# EAGLE board knxhome-lqfp48 (EAGLE 9.3.1)
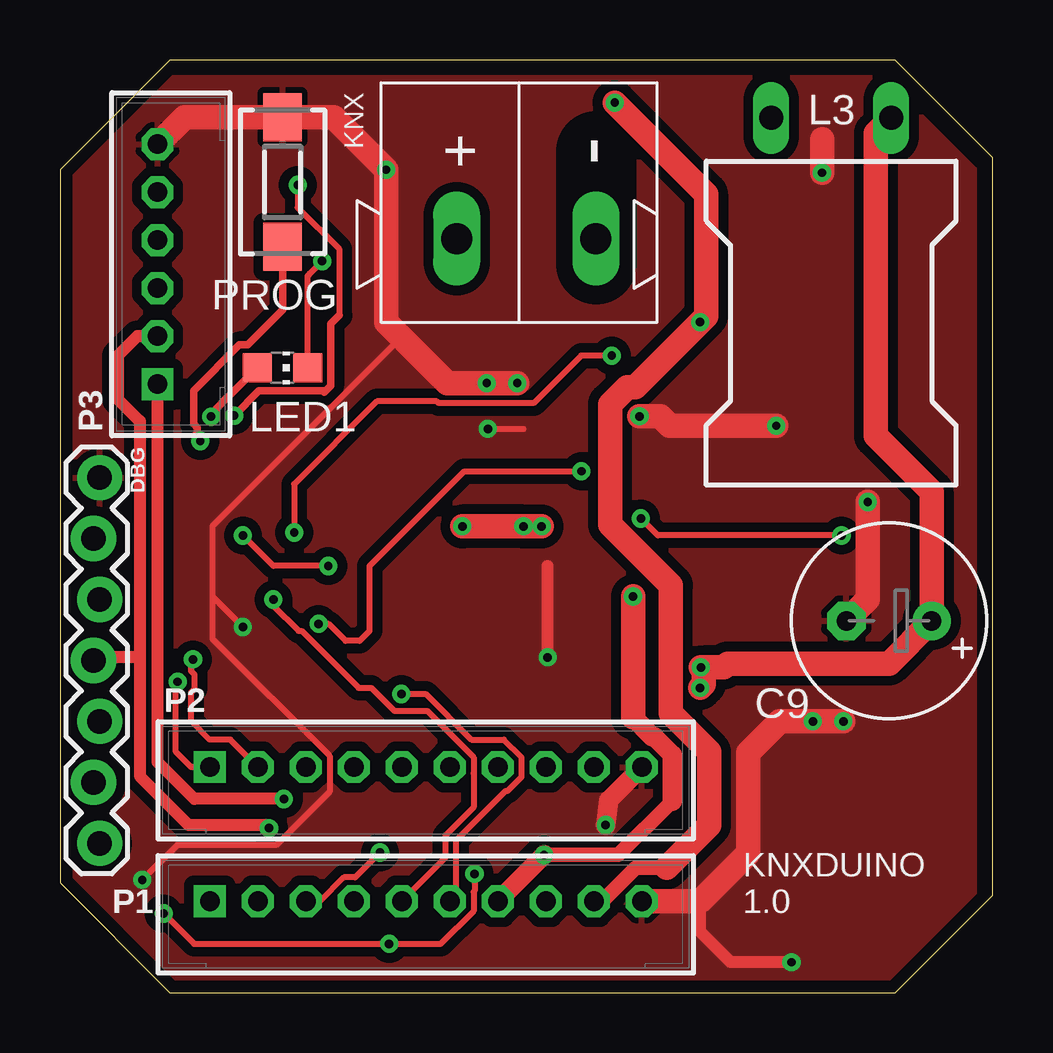
[diagram p0: board, top side]
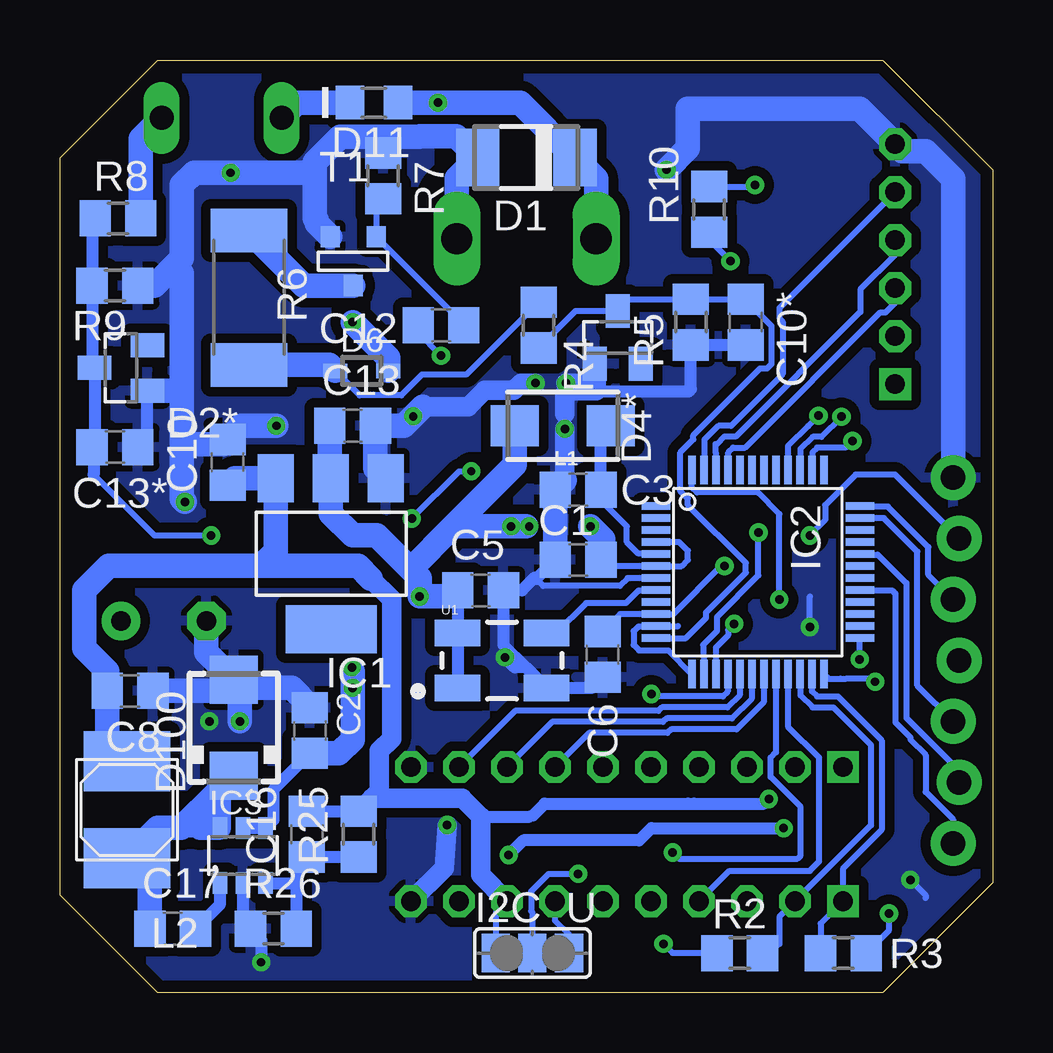
[diagram p1: board, bottom side, seen from below]

Size 38.86 x 38.86 mm. Coordinates in mm from the lower left corner, seen from the top.
Outline: 38.86,4.06 38.86,34.8 34.8,38.86 4.57,38.86 0,34.29 0,4.57 4.57,0 34.8,0 38.86,4.06
Copper layers (1*16): Top 0.035mm / dielectric 1.5mm / Bottom 0.035mm
Design rules "default *": minimum track width 8mil, minimum drill 0.35mm, track to track 8mil, track to pad 8mil, pad to pad 6mil, via to via 8mil, smd to smd 6mil, copper to edge 20mil, drill to drill 6mil, minimum pad ring 10mil, minimum via ring 8mil, stop-mask expansion 4mil, vias tented up to drill 40mil, thermal gap 10mil
Net classes: 1 power: width 0.305 mm
tRestrict: 1 lines
bRestrict: 3 lines

## Footprints (pad centres in the part's own frame; a part is rotated, then mirrored left to right if it is on the bottom)
C0805 = smd 1.3 x 1.5: 1 -0.95,0; 2 0.95,0
E3,5-8 = drill 0.813 pad 1.6: + -1.778,0 | drill 0.813 pad 1.6 octagon: - 1.778,0
DO-214AC = smd 1.8 x 2.4: A 2.025,0; C -2.025,0
SOT23 = smd 1 x 1.4: 1 -0.95,-1.1; 2 0.95,-1.1; 3 0,1.1
SOD323 = smd 1 x 0.6: 1 -1.1,0; 2 1.1,0
D0805 = smd 1.2 x 1.4: A 1,0; C -1,0
SMA = smd 2 x 2: A 2,0; C -2,0
1X07_LOCK = drill 1.016 pad 1.88: 1 0,0.127; 2 2.54,-0.127; 3 5.08,0.127; 4 7.62,-0.127; 5 10.16,0.127; 6 12.7,-0.127; 7 15.24,0.127
SJ_2 = smd 1.168 x 1.6: 1 -1.524,0; 2 0,0; 3 1.524,0
SOT223 = smd 1.499 x 2.007: 1 -2.261,-3.15; 2 0.025,-3.15; 3 2.311,-3.15 | smd 3.81 x 2.007: 4 0,3.15
LQFP48 = smd 0.3 x 1.2: 1 -2.75,-4.25; 2 -2.25,-4.25; 3 -1.75,-4.25; 4 -1.25,-4.25; 5 -0.75,-4.25; 6 -0.25,-4.25; 7 0.25,-4.25; 8 0.75,-4.25; 9 1.25,-4.25; 10 1.75,-4.25; 11 2.25,-4.25; 12 2.75,-4.25; 25 2.75,4.25; 26 2.25,4.25; 27 1.75,4.25; 28 1.25,4.25; 29 0.75,4.25; 30 0.25,4.25; 31 -0.25,4.25; 32 -0.75,4.25; 33 -1.25,4.25; 34 -1.75,4.25; 35 -2.25,4.25; 36 -2.75,4.25 | smd 1.2 x 0.3: 13 4.25,-2.75; 14 4.25,-2.25; 15 4.25,-1.75; 16 4.25,-1.25; 17 4.25,-0.75; 18 4.25,-0.25; 19 4.25,0.25; 20 4.25,0.75; 21 4.25,1.25; 22 4.25,1.75; 23 4.25,2.25; 24 4.25,2.75; 37 -4.25,2.75; 38 -4.25,2.25; 39 -4.25,1.75; 40 -4.25,1.25; 41 -4.25,0.75; 42 -4.25,0.25; 43 -4.25,-0.25; 44 -4.25,-0.75; 45 -4.25,-1.25; 46 -4.25,-1.75; 47 -4.25,-2.25; 48 -4.25,-2.75
SOT23-6 = smd 0.6 x 0.9: 1 -0.95,-1.15; 2 0,-1.15; 3 0.95,-1.15; 4 0.95,1.15; 5 0,1.15; 6 -0.95,1.15
WAGO-243-211 = drill 1.3 long: 1+ 0,2.65; 2- 0,-3.15
SM-B5 = smd 2 x 1.7: 1 -2,0; 2 2,0
PIS2812 = smd 3.6 x 2.5: P$1 0,2.025; P$2 0,-2.025
BS11_LIEGEND = drill 1 long: 1 -2.5,0; 2 2.5,0
CHIP-LED0805 = smd 1.2 x 1.2: A 0,-1.05; C 0,1.05
B10B-PH-K = drill 0.813 square: 1 -9,0 | drill 0.813 octagon: 2 -7,0; 3 -5,0; 4 -3,0; 5 -1,0; 6 1,0; 7 3,0; 8 5,0; 9 7,0; 10 9,0
B6B-PH-K = drill 0.813 square: 1 -5,0 | drill 0.813 octagon: 2 -3,0; 3 -1,0; 4 1,0; 5 3,0; 6 5,0
DTSM-3 = smd 2 x 1.6: 1 -2.7,0; 2 2.7,0
R0805 = smd 1.3 x 1.5: 1 -0.95,0; 2 0.95,0
R2512 = smd 1.8 x 3.2: 1 -2.8,0; 2 2.8,0
SOT-23 = smd 0.787 x 0.889: 1 0.025,-1.016; 2 -0.94,1.016; 3 0.991,1.016
CRYSTAL-OSC-SMD-5X3 = smd 1.9 x 1.1: 1 -1.85,-1.15; 2 1.85,-1.15; 3 1.85,1.15; 4 -1.85,1.15

## Placement (x,y rotation side)
C1  100n  [C0805]  17.27,18.03 180 bottom
C2  4.7µF/50V  [C0805]  28.45,10.92 270 bottom
C3  100n  [C0805]  17.27,20.95 180 bottom
C5  [C0805]  21.34,16.76 0 bottom
C6  100n  [C0805]  16.26,14.1 270 bottom
C8  22µ/10V  [C0805]  35.94,12.57 180 bottom
C9  100uF 50V  [E3,5-8]  34.54,15.49 180 top
C10  1u  [C0805]  31.88,22.1 90 bottom
C10*  10p  [C0805]  10.29,27.94 270 bottom
C12  10n  [C0805]  22.99,27.81 0 bottom
C13  4u7  [C0805]  26.67,23.62 0 bottom
C13*  10n  [C0805]  36.58,22.73 0 bottom
C16  270n  [C0805]  28.57,6.6 90 bottom
C17  15nF  [C0805]  34.16,2.67 0 bottom
D1  SMAJ40AC  [DO-214AC]  19.43,34.8 180 bottom
D2*  3V3  [SOT23]  36.32,26.04 90 bottom
D4*  3V3  [SOT23]  15.62,27.3 0 bottom
D6  400mA  [SOD323]  26.29,25.91 0 bottom
D11  TS4148  [D0805]  25.78,37.08 0 bottom
D100  MBRS1100  [SMA]  31.62,11.05 90 bottom
DBG  [1X07_LOCK]  1.52,21.46 270 top
I2C_U  [SJ_2]  19.18,1.65 0 bottom
IC1  LDL1117S33  [SOT223]  27.56,18.29 180 bottom
IC2  STM32G071CBT6  [LQFP48]  9.78,17.53 270 bottom
IC3  BD9G101  [SOT23-6]  31.24,5.71 0 bottom
KNX  WAGO-243-211  [WAGO-243-211]  19.18,31.42 90 top
L1  FERRITE BEAD  [SM-B5]  17.91,23.62 0 bottom
L2  6.8µH  [PIS2812]  36.07,7.62 180 bottom
L3  150mH  [BS11_LIEGEND]  32.13,36.45 0 top
LED1  [CHIP-LED0805]  9.27,26.04 270 top
P1  B10B-PH-K  [B10B-PH-K]  15.24,3.81 0 top
P2  B10B-PH-K  [B10B-PH-K]  15.24,9.4 0 top
P3  B6B-PH-K  [B6B-PH-K]  4.06,30.35 90 top
PROG  DTSM-3  [DTSM-3]  9.27,33.78 90 top
R2  10k  [R0805]  10.54,1.65 180 bottom
R3  10k  [R0805]  6.22,1.65 0 bottom
R4  33k  [R0805]  18.92,27.81 90 bottom
R5  1k  [R0805]  12.57,27.94 90 bottom
R6  68R 1W  [R2512]  30.99,28.96 90 bottom
R7  10k  [R0805]  25.4,34.04 270 bottom
R8  33k  [R0805]  36.45,32.26 0 bottom
R9  1k  [R0805]  36.58,29.46 180 bottom
R10  510R  [R0805]  11.81,32.64 90 bottom
R25  2k4  [R0805]  26.42,6.6 90 bottom
R26  680R  [R0805]  29.97,2.67 0 bottom
T1  [SOT-23]  26.67,30.48 0 bottom
U1  OSCILLATOR5X3-PIN1-INDICATED  [CRYSTAL-OSC-SMD-5X3]  20.45,13.84 0 bottom

## Library data of the parts
C1-C3 C5 C6 C8 C10 C10* C12 C13 C13* C16 C17 = rcl; SPICEPREFIX: C
C9 = rcl
D1 D2* D4* D11 = diode
D6 = zetex; MPN: CDSOD323-T05C; OC_FARNELL: 1824860; OC_NEWARK: 79R6078
D100 = diode; REICHELT: MBRS 1100 SMD
DBG = SparkFun-Connectors
I2C_U = jumper
IC1 = burr-brown; MPN: REG1117; OC_FARNELL: 1097566; OC_NEWARK: 14P6981
IC2 = stm32g0
IC3 L2 = Stefan_selfbus
KNX = Connector_for_Selfbus-Projects
L1 = inductor-neosid; OC_FARNELL: unknown; OC_NEWARK: unknown
L3 = inductor-neosid
LED1 = led
P1-P3 = con-jst-ph
PROG = switch-tact
R2-R10 R25 R26 = rcl; SPICEPREFIX: R
T1 = zetex; OC_FARNELL: unknown; OC_NEWARK: unknown
U1 = SparkFun-FreqCtrl

## Nets
+3V3: C1.1 C5.1 C13.1 DBG.4 I2C_U.3 IC1.2 IC2.4 IC2.6 L1.1 P1.7 P3.2 U1.1 U1.4
ADJ: C16.1 IC3.3 R25.1 R26.2
BTN: IC2.38 PROG.1
DRX: DBG.6 IC2.32
DTX: DBG.7 IC2.29
GND: C1.2 C2.1 C3.2 C5.2 C6.2 C8.1 C9.- C10*.2 C10.2 C13*.2 C13.2 D1.A D2*.1 D4*.1 D100.A DBG.1 IC1.1 IC2.7 IC3.2 KNX.2- P1.10 P2.10 P3.6 PROG.2 R5.1 R7.1 R9.1 R26.1 T1.2 U1.2
I2C_PUP: I2C_U.2 R2.2 R3.2
I2C_SCL: IC2.22 P1.2 R2.1
I2C_SDA: IC2.23 P1.1 R3.1
I2CB_SCL: IC2.45 P3.3
I2CB_SDA: IC2.46 P3.4
IO_AN: IC2.16 P1.6
IO_DE: IC2.20 P1.3
IO_PA6: IC2.17 P2.9
IO_PA7: IC2.18 P2.8
IO_PB0: IC2.19 P2.7
IO_PB12: IC2.24 P2.1
IO_PB13: IC2.25 P2.2
IO_RX: IC2.48 P1.5
IO_TX: IC2.21 P1.4
IOB_PB8: IC2.47 P3.5
KNX+ [power]: D1.C D6.2 D11.A KNX.1+ P1.9
KNX_DC: C2.2 C9.+ IC3.4 IC3.5 L3.2 R8.2
KNX_DC_AN: C13*.1 D2*.3 IC2.15 R8.1 R9.2
KNX_RECT: D6.1 R4.2 R6.1
KNX_RX_AN: C10*.1 D4*.3 IC2.12 R4.1 R5.2
KNX_TX: C12.1 IC2.14
LED: IC2.39 LED1.A
LED2: IC2.40 R10.2
LX: C17.1 D100.C IC3.6 L2.P$1
N$1: D11.C L3.1
N$4: LED1.C R10.1
N$5: IC2.11 IC2.13
N$7: R6.2 T1.1
N$8: C12.2 R7.2 T1.3
N$19: C17.2 IC3.1
NRST: C6.1 DBG.2 IC2.10
OSC: IC2.8 U1.3
SWCLK: DBG.3 IC2.36
SWDIO: DBG.5 IC2.35
VCC: C8.2 C10.1 C16.2 I2C_U.1 IC1.3 L2.P$2 P1.8 P3.1 R25.2
VDDA: C3.1 IC2.5 L1.2

## Tracks (layer width: path | path; a pad name or v marks a point on that pad's centre or on a via)
+3V3  (via drill 0.35)
  Top 0.508: DBG.4 1.52,13.97 3.28,13.97 3.33,14.02 | 3.33,14.02 3.33,23.81 2.41,24.73 2.41,26.54 3.22,27.35 P3.2 | 3.33,14.02 3.33,9.02 5.36,6.99 8.58,6.99 v8.71,6.86
  Top 0.61: 25.51,7.98 23.27,5.74 v20.17,5.74
  Top 0.813: P1.7 v20.17,5.74 | 23.88,11.47 24.68,10.67 24.77,10.67 25.51,9.92 25.51,7.98
  Top 1.016: 23.88,11.47 v23.88,16.51 | v16.76,19.43 v19.31,19.43 v20.07,19.43
  Bottom 0.254: 16.23,18.06 15.94,17.78 IC2.6 12.96,17.78 12.7,18.03 12.7,18.41 13.06,18.78 IC2.4 | 16.23,17.94 C1.1 | P1.7 18.24,3 17.65,2.41 I2C_U.3
  Bottom 0.508: U1.1 U1.4 22.29,15 C5.1 | v20.17,5.74 19.56,6.35 14.73,6.35 14.22,6.86 v8.71,6.86
  Bottom 1.016: C13.1 27.62,21.47 IC1.2 27.58,19.96 26.67,19.05 25.65,19.05 24.26,17.65 | 24.26,17.65 23.88,17.27 v23.88,16.51 22.54,16.51 C5.1 | 24.26,17.65 22.48,19.43 | 22.48,19.43 v20.07,19.43 19.44,19.43 | v16.76,19.43 16.23,18.89 16.23,18.06 16.23,17.94 | 22.48,19.43 19.91,22 L1.1
ADJ
  Bottom 0.508: R25.1 C16.1 29.02,5.21 29.02,4.45 | 29.02,4.45 R26.2 | IC3.3 29.14,4.57 29.02,4.45
BTN  (via drill 0.35)
  Top 0.254: 5.59,23.24 5.71,23.11 v5.84,22.99
  Top 0.305: PROG.1 9.27,28.45 7.81,26.99 7.47,26.99 5.56,25.08 5.56,23.7 5.71,23.55 5.71,23.11
  Bottom 0.254: v5.84,22.99 6.12,22.71 7.32,22.71 7.51,22.51 7.51,21.8 IC2.38
DRX
  Bottom 0.254: IC2.32 5.51,18.26 4.79,18.26 3.6,17.06 3.6,11.45 1.4,9.25 DBG.6
DTX
  Bottom 0.254: IC2.29 5.52,16.76 4.19,16.76 4.05,16.63 4.05,11.26 3.43,10.64 3.43,10.54 2.79,9.91 2.79,8.36 1.65,7.22 DBG.7
GND  (via drill 0.35)
  Top 0.254: v17.83,23.5 19.3,23.5 | 14.22,27.3 6.35,19.43 6.35,16.51 | 6.35,16.51 v7.62,15.24 | 6.35,16.51 6.35,14.74 11.23,9.86 11.23,8.38 9,6.15 4.88,6.15 v3.43,4.7
  Top 0.508: v30.48,1.27 27.94,1.27 26.67,2.54 26.67,3.81 | v20.32,13.97 20.32,17.78
  Top 0.813: P2.10 22.86,8.02 v22.73,6.99
  Top 1.016: v33.66,20.45 33.66,16.38 C9.- | v29.84,23.62 25.4,23.62 25.01,24.02 v24.14,24.02 | P1.10 26.67,3.81 28.68,5.82 28.68,9.99 29.99,11.3 v31.37,11.3 v32.64,11.3 | v19.05,25.4 v17.78,25.4 16.13,25.4 14.22,27.3 13.59,27.94 v13.59,34.29 11.4,36.48 PROG.2 5.19,36.48 P3.6 | v31.75,34.16 31.75,35.56
  Bottom 0.254: 19.08,17.3 19.02,17.24 18.73,16.95 15.54,16.95 15.21,17.28 IC2.7 | 17.83,24.13 v17.83,23.5 | v7.62,15.24 7.62,16.51 | v3.43,4.7 2.79,4.06 2.79,3.94
  Bottom 0.508: C13*.2 35.22,23.14 D2*.1 | C1.2 19.02,17.24 | 19.08,17.3 19.62,16.76 C5.2 20.39,14.48 19.46,13.56 | 19.46,13.56 U1.2 16.71,12.69 C6.2 | IC3.2 31.24,2.99 R26.1 30.48,2.23 v30.48,1.27 | C10*.2 R5.1 12.57,25.15 12.67,25.05 17.65,25.05 | 19.46,13.56 19.91,13.56 v20.32,13.97
  Bottom 0.813: v19.05,25.4 19.65,25.4 19.95,25.09 21.17,25.09 21.86,24.41 23.75,24.41 | 17.83,24.13 17.83,24.95 17.69,25.08 17.68,25.08 | v17.83,23.5 17.83,21.35 | P1.10 22.86,5.19 v22.73,6.99 | D4*.1 16.51,26.14 16.51,25.08 | 16.51,25.08 17.68,25.08 | 17.65,25.05 17.68,25.08 | 16.51,25.08 16.83,25.4 v17.78,25.4
  Bottom 1.016: KNX.2- 22.33,33.93 D1.A 22.34,35.69 23.87,35.69 23.89,35.67 25.4,35.67 | 25.4,35.67 27.19,35.67 28.26,34.61 28.26,34.16 | 34.1,30.29 33.78,30.61 33.78,33.66 33.27,34.16 v31.75,34.16 28.26,34.16 | 34.1,30.29 34.92,29.46 R9.1 | R7.1 25.4,35.67 | T1.2 28.17,32.05 28.17,32.19 28.26,32.28 28.26,34.16 | 34.1,30.29 33.78,29.97 33.78,25.4 | D2*.1 34.1,25.09 33.78,25.4 | C8.1 32.1,12.57 D100.A | D100.A 31.27,12.7 29.21,12.7 28.45,11.94 C2.1 | D100.A 32.77,14.19 C9.- | 33.78,25.4 33.78,22.86 | 33.78,22.86 33.78,20.57 v33.66,20.45 | 33.78,22.86 32.06,22.86 C10.2 31.3,23.62 v29.84,23.62 | IC1.1 25.72,21.86 C13.2 24.54,23.62 v24.14,24.02 23.75,24.41 | 17.83,21.35 C3.2 C1.2 | v31.37,11.3 31.37,12.79 D100.A | DBG.1 1.65,33.91 2.79,35.05 3.76,35.05 P3.6 5.54,36.83 12.7,36.83 12.7,35.18 v13.59,34.29
  pour Top (isolate 0.406): 0,34.29 0,5.08 5.08,0 34.29,0 38.1,3.81 38.1,5.08 38.1,34.29 34.29,38.1 5.08,38.1 3.81,38.1
  pour Bottom (isolate 0.406): 0,34.29 0,5.08 5.08,0 34.29,0 38.1,3.81 38.1,34.29 34.29,38.1 5.08,38.1 3.81,38.1
I2C_PUP  (via drill 0.35)
  Top 0.254: v4.32,3.3 5.59,2.03 v13.72,2.03 15.86,2.03 17.23,3.4 17.23,4.2 17.27,4.24 v17.27,4.95
  Bottom 0.254: R3.2 4.32,2.61 v4.32,3.3 | I2C_U.2 19.18,3.35 19.23,3.4 19.23,4.22 19.18,4.27 18.5,4.95 v17.27,4.95 | R2.2 13.34,1.65 v13.72,2.03
I2C_SCL
  Bottom 0.254: R2.1 9.27,1.65 8.89,2.03 8.89,3.16 P1.2 5.08,6.97 5.08,10.33 6.64,11.89 7.5,11.89 8.01,12.39 8.01,13.26 IC2.22
I2C_SDA
  Bottom 0.254: R3.1 7.17,2.88 P1.1 6.24,5.16 4.62,6.78 4.62,10.52 6.45,12.35 7.27,12.35 7.32,12.35 7.53,12.56 IC2.23
I2CB_SCL
  Bottom 0.254: P3.3 4.06,28.74 4.46,28.34 4.68,28.34 10.31,22.71 10.82,22.71 11.01,22.51 11.01,21.8 IC2.45
I2CB_SDA
  Bottom 0.254: P3.4 4.06,30.75 5.51,29.31 5.51,28.36 10.71,23.16 11.18,23.16 11.48,22.86 11.54,22.86 11.55,22.85 11.55,22.52 11.55,22.51 11.55,21.8 IC2.46
IO_AN  (via drill 0.35)
  Top 0.254: v14.22,12.45 15.24,12.45 17.14,10.54 18.5,10.54 19.23,9.81 19.23,8.99 19.09,8.85 18.65,8.41 18.57,8.41 16.51,6.35 16.51,4.08 P1.6
  Bottom 0.254: IC2.16 11.05,13.26 11.05,12.54 11.24,12.35 14.12,12.35 v14.22,12.45
IO_DE  (via drill 0.35)
  Top 0.254: v13.34,5.84 12.29,4.8 11.83,4.8 10.84,3.81 P1.3
  Bottom 0.254: IC2.20 9.03,10.01 9.25,9.79 9.25,8.99 9.24,8.99 8,7.75 8,5.71 8.13,5.59 13.08,5.59 v13.34,5.84
IO_PA6
  Bottom 0.254: IC2.17 10.55,13.26 10.55,12.7 10.55,12.39 11.05,11.89 13.78,11.89 13.93,11.74 19.9,11.74 P2.9
IO_PA7
  Bottom 0.254: IC2.18 10.05,13.26 10.05,12.25 10.86,11.43 13.59,11.43 13.74,11.28 18.36,11.28 P2.8
IO_PB0
  Bottom 0.254: IC2.19 9.55,13.26 9.55,12.1 10.67,10.97 13.4,10.97 13.55,10.82 16.82,10.82 P2.7
IO_PB12  (via drill 0.35)
  Top 0.254: P2.1 5.46,9.4 4.83,10.03 4.83,12.88 v4.9,12.95
  Bottom 0.254: IC2.24 6.83,13.08 6.35,13.08 6.1,13.08 5.03,13.08 v4.9,12.95
IO_PB13  (via drill 0.35)
  Top 0.254: P2.2 7.1,10.54 6.22,10.54 5.46,11.3 5.46,12.51 5.61,12.66 5.61,13.25 5.46,13.39 5.46,13.8 v5.54,13.89
  Bottom 0.254: v5.54,13.89 5.53,13.9 IC2.25
IO_RX  (via drill 0.35)
  Top 0.254: v8.89,16.38 8.89,16.13 9.95,15.07 10.07,15.07 12.44,12.7 12.97,12.7 13.93,11.74 15.3,11.74 17.23,9.81 17.23,9.16 17.25,9.14 17.23,9.12 17.23,7.72 16.05,6.54 16.05,5.62 P1.5
  Bottom 0.254: IC2.48 12.53,21.06 12.32,20.85 9.8,20.85 8.89,19.94 v8.89,16.38
IO_TX
  Bottom 0.254: IC2.21 8.53,11.09 7.23,9.79 7.23,5.47 7.62,5.08 10.97,5.08 P1.4
IOB_PB8
  Bottom 0.254: IC2.47 12.01,21.8 12.01,23.04 11.43,23.62 10.9,23.62 8.75,25.77 8.75,27.97 8.89,28.11 8.89,28.53 P3.5
KNX+  (via drill 0.35)
  Top 0.61: P1.9 22.59,3.81 23.98,5.21 25.27,5.21
  Top 1.016: v23.11,37.08 26.92,33.27 26.92,28.19 v26.67,27.94 23.96,25.23 23.64,25.23 22.92,24.52 22.92,19.5 25.45,16.97 25.45,11.63 27.05,10.03 27.05,6.99 25.27,5.21
  Bottom 1.016: D11.A v23.11,37.08 19.69,37.08 D1.C 16.53,33.92 KNX.1+ | D6.2 25.19,26.46 v26.67,27.94
KNX_DC  (via drill 0.35)
  Top 1.016: L3.2 34,35.81 34,23.2 36.32,20.88 C9.+ 34.54,13.72 27.81,13.72 27.65,13.55 26.83,13.55 | 26.83,13.55 26.83,12.86 v26.67,12.7 | v26.7,13.55 26.83,13.55
  Bottom 0.508: C2.2 29.97,8.45 29.97,7.18 IC3.4 IC3.5
  Bottom 1.016: R8.2 35.5,35.58 L3.2 | C2.2 27.24,9.97 26.67,10.54 v26.67,12.7 26.67,13.39 26.7,13.42
KNX_DC_AN  (via drill 0.35)
  Top 0.254: v10.78,15.37 11.19,15.37 11.9,14.66 12.48,14.66 12.9,15.07 12.9,17.78 16.85,21.73 v21.73,21.73 | v32.57,19.05 24.91,19.05 v24.2,19.76
  Bottom 0.254: 37.47,21.59 34.92,19.05 v32.57,19.05 | v10.78,15.37 11.03,15.12 11.03,14.88 11.53,14.38 IC2.15 | v24.2,19.76 22.24,21.73 v21.73,21.73
  Bottom 0.508: R8.1 37.53,32.13 R9.2 37.53,26.14 D2*.3 37.42,22.84 C13*.1 37.47,22.67 37.47,21.59
KNX_RECT
  Bottom 0.254: R4.2 21.94,25.75 23.78,25.75 24.64,24.89 26.37,24.89 D6.1
  Bottom 1.016: R6.1 27.64,26.16 D6.1
KNX_RX_AN
  Bottom 0.254: R4.1 17.38,28.41 D4*.3 15.14,28.89 R5.2 C10*.1 10.29,28.86 9.21,27.78 9.21,26.2 9.4,26.01 9.69,26.01 12.47,23.23 12.47,23.06 13.01,22.51 13.01,20.89 12.7,20.58 12.7,20.32 10.29,17.91 10.29,17.5 11.94,15.85 11.94,15.62 12.78,14.78 IC2.12
KNX_TX  (via drill 0.35)
  Top 0.254: v22.99,26.54 21.72,26.54 19.74,24.56 15.78,24.56 15.71,24.64 13.21,24.64 9.76,21.19 v9.76,19.18
  Bottom 0.254: IC2.14 12.05,13.3 12.05,14.01 12.06,14.03 12.06,14.49 11.48,15.07 11.48,15.66 9.76,17.39 v9.76,19.18 | v22.99,26.54 23.94,27.49 C12.1
LED  (via drill 0.35)
  Top 0.305: v6.3,24 6.3,24.11 6.52,24.34 6.52,24.35 6.95,24.78 6.96,24.78 LED1.A
  Bottom 0.254: IC2.39 8.01,21.8 8.01,22.66 7.5,23.16 7.14,23.16 v6.3,24
LED2  (via drill 0.35)
  Top 0.254: v9.91,33.66 9.91,32.71 11.63,30.99 11.63,28.22
  Top 0.305: 11.63,28.22 11.28,27.86 11.28,25.29 11.07,25.08 | 11.07,25.08 11.01,25.02 | v7.26,24.05 8.29,25.08 11.07,25.08
  Bottom 0.254: R10.2 9.97,33.59 v9.91,33.66 | v7.26,24.05 7.68,23.62 7.7,23.62 8.53,22.79 IC2.40
LX
  Bottom 0.813: 33.02,6.87 34.29,6.87 | IC3.6 32.25,6.87
  Bottom 1.016: C17.1 35.11,6.15 35.31,6.35 L2.P$1 34.8,6.87 34.29,6.87 33.81,6.87 32.25,8.42 | 33.02,6.87 32.25,6.87 32.25,8.42 | D100.C 32.25,8.42
N$1
  Bottom 1.016: L3.1 29,37.08 D11.C
N$4  (via drill 0.35)
  Top 0.254: LED1.C 10.32,29.86 10.4,29.95 10.4,29.96 v10.92,30.48
  Bottom 0.254: v10.92,30.48 11.81,31.37 R10.1
N$5
  Bottom 0.254: IC2.11 13.12,15.28 13.14,15.26 14.77,15.26 14.96,15.06 14.96,14.49 14.73,14.26 13.51,14.26 IC2.13
N$7
  Bottom 1.016: T1.1 28.7,29.46 R6.2
N$8
  Bottom 0.254: R7.2 25.68,32.81 T1.3 22.04,27.85 C12.2
N$19
  Bottom 0.508: C17.2 32.19,3.69 IC3.1
NRST  (via drill 0.35)
  Top 0.254: v11.18,17.78 8.89,17.78 v7.62,19.05
  Bottom 0.254: C6.1 15.53,15.78 IC2.10 13.31,15.78 11.31,17.78 v11.18,17.78 | v7.62,19.05 6.99,19.68 6.99,20.32 5.71,21.59 4.06,21.59 DBG.2
OSC
  Bottom 0.254: U1.3 18.18,14.99 16.94,16.23 15.29,16.23 14.77,16.76 14.05,16.76 IC2.8
SWCLK
  Bottom 0.254: IC2.36 5.53,20.26 5.52,20.26 4.37,20.26 2.68,18.57 2.68,17.41 DBG.3
SWDIO
  Bottom 0.254: DBG.5 3.14,12.79 3.14,18.38 4.54,19.78 IC2.35
VCC  (via drill 0.35)
  Top 0.508: P3.1 4.06,9.61 5.39,8.28 5.6,8.07 v9.33,8.07
  Bottom 0.254: P1.8 20.7,3.35 I2C_U.1
  Bottom 0.406: 19.33,7.33 19.27,7.39 19.15,7.39
  Bottom 0.508: C16.2 R25.2 | 21.34,7.33 19.33,7.33 | 19.15,7.39 18.67,7.87 12.7,7.87 12.45,7.87 9.53,7.87 v9.33,8.07
  Bottom 0.813: 25.91,17.26 25.04,16.39 25.04,10.59 25.55,10.08 25.55,8.42 25.88,8.1 | 25.88,8.1 R25.2 | P1.8 21.34,4.91 21.34,7.33 22.1,8.1 25.88,8.1
  Bottom 1.016: L2.P$2 36.89,10.47 C8.2 36.89,13.4 37.85,14.35 37.85,16.76 36.83,17.78 30.48,17.78 | C10.1 31.59,21.44 IC1.3 29.87,18.39 30.48,17.78 | 30.48,17.78 26.43,17.78 25.91,17.26
VDDA
  Bottom 0.254: IC2.5 14.05,18.3 14.77,18.3 15.24,18.77 15.24,19.43 16.32,20.51 C3.1
  Bottom 0.508: C3.1 16.32,23.21 L1.2

## Text on the board
tNames: KNXDUINO / 1.0